# EAGLE board lm3410-boost-flashlight-driver-17mm-mk-1.0.1 (EAGLE 6.6.0)
VERSION: v1.2
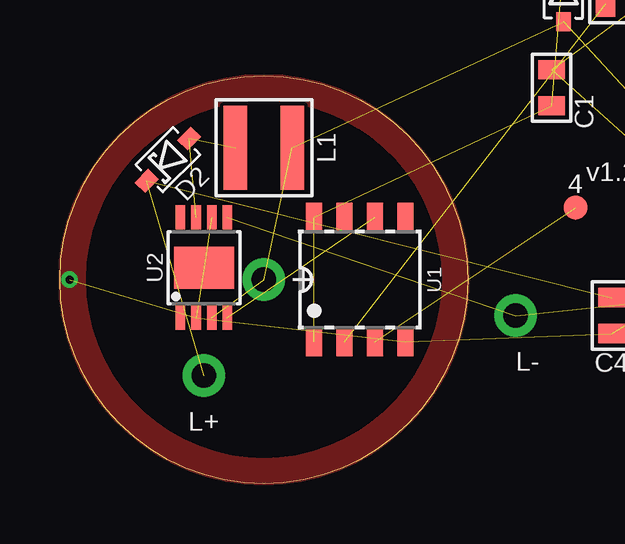
[diagram p0: board, top side]
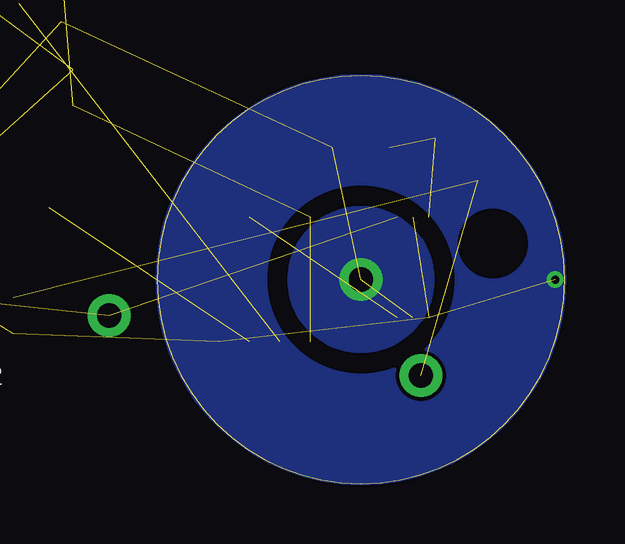
[diagram p1: board, bottom side, seen from below]

Size 17 x 17 mm. Coordinates in mm from the lower left corner, seen from the top.
Outline: 0,8.5 arc-180 17,8.5 arc-180 0,8.5
Copper layers (1*16): Top 0.0356mm / dielectric 1.5011mm / Bottom 0.0356mm
Design rules "LaenPCBOrder2 *": minimum track width 6mil, minimum drill 13mil, track to track 6mil, track to pad 6mil, pad to pad 6mil, via to via 6mil, smd to smd 6mil, copper to edge 0mil, drill to drill 6mil, minimum pad ring 7mil, minimum via ring 7mil, stop-mask expansion 3mil, vias tented up to drill 20mil, thermal gap 10mil
bRestrict: area 1.8,8.8 to 4.2,11.2; area 17.8,5.8 to 20.2,8.2; area 5,5 to 12,12

## Footprints (pad centres in the part's own frame; a part is rotated, then mirrored left to right if it is on the bottom)
1X01-SMD-1MM-DIA-NS = smd 1 x 1: P$1 0,0
1X01-1MM-CIR-NS = drill 1.016 pad 1.778: 1 0,0
1X01_NOSILK_NOSTOP = drill 0.33: P$1 0,0
C0603-TIGHTER = smd 0.8 x 1.1: 1 -0.75,0; 2 0.75,0
SOD323-SCHOTTKY = smd 0.8 x 0.6: A -1.25,0; C 1.25,0
XFL4020 = smd 0.98 x 3.5: P$1 -1.185,0; P$2 1.185,0
R0805 = smd 1.3 x 1.5: 1 -0.95,0; 2 0.95,0
SO08-SKINNYPADS = smd 0.65 x 1.2: 1 -1.905,-2.6; 2 -0.635,-2.6; 3 0.635,-2.6; 4 1.905,-2.6; 5 1.905,2.6; 6 0.635,2.6; 7 -0.635,2.6; 8 -1.905,2.6
MSOP-8-PAD-LM3410 = smd 1 x 0.4: 1 -2.1,0.975; 2 -2.1,0.325; 3 -2.1,-0.325; 4 -2.1,-0.975; 5 2.1,-0.975; 6 2.1,-0.325; 7 2.1,0.325; 8 2.1,0.975 | smd 1.75 x 2.5: PAD 0,0

## Placement (x,y rotation side)
4  M01SMD-1MM-DIA-NS  [1X01-SMD-1MM-DIA-NS]  21.5,11.5 0 top  (outside the outline)
+  M01PTH-1MM-CIR-NS  [1X01-1MM-CIR-NS]  8.5,8.5 180 top
-  M01NOT-A-VIA-NOPE  [1X01_NOSILK_NOSTOP]  0.4,8.5 90 bottom
C1  10u  [C0603-TIGHTER]  20.5,16.5 90 top  (outside the outline)
C2  1u  [C0603-TIGHTER]  23.5,20 0 top  (outside the outline)
C3  4u7  [C0603-TIGHTER]  26,13 180 top  (outside the outline)
C4  10u  [C0603-TIGHTER]  23,7 270 top  (outside the outline)
D1  BAT165  [SOD323-SCHOTTKY]  21,20.5 90 top  (outside the outline)
D2  BAT165  [SOD323-SCHOTTKY]  4.5,13.5 225 top
FRAME1  FRAME-LETTERNO_PACKAGE  [DUMMY]  0,0 0 top
L1  1uH  [XFL4020]  8.5,14 180 top
L+  M01PTH-1MM-CIR-NS  [1X01-1MM-CIR-NS]  6,4.5 270 top
L-  M01PTH-1MM-CIR-NS  [1X01-1MM-CIR-NS]  19,7 180 top
R3  0R127  [R0805]  29,9 270 top  (outside the outline)
U1  Tiny25  [SO08-SKINNYPADS]  12.5,8.5 0 top
U2  LM3410XMYDGN  [MSOP-8-PAD-LM3410]  6,9 90 top

## Library data of the parts
4 + - C1-C4 D1 D2 L1 L+ L- R3 U1 U2 = a_parts
FRAME1 = a_parts; DESIGNER: sean@yak.net; VERSION: v1.2

## Nets
4: 4.P$1 U1.3
ALTPWM: U1.5
FB: L-.1 R3.2 U2.5
GND: -.P$1 C1.2 C2.2 C3.2 C4.2 R3.1 U1.4 U2.2 U2.6 U2.PAD
LED+: C4.1 D2.C L+.1
N$2: C2.1 U1.2
PWM: U1.6 U2.4
SW: D2.A L1.P$2 U2.7
VBAT: +.1 C3.1 D1.A L1.P$1 U2.3
VCC: C1.1 D1.C U1.1 U1.8

## Tracks (layer width: path | path; a pad name or v marks a point on that pad's centre or on a via)
4  (1 unrouted)
FB  (2 unrouted)
GND  (9 unrouted)
  pour Top (isolate 0.152, rank 6, no thermals): 0,8.5 arc90 8.5,0 arc90 17,8.5 16,8.5 arc-90 8.5,1 arc-90 1,8.5
  pour Bottom (isolate 0.152, rank 6, no thermals): 8.5,0 arc-90 0,8.5 arc-90 8.5,17 arc-90 17,8.5 arc-90
  pour Top (isolate 0.152, rank 6, no thermals): 17,8.5 arc90 8.5,17 arc90 0,8.5 1,8.5 arc-90 8.5,16 arc-90 16,8.5
LED+  (2 unrouted)
N$2  (1 unrouted)
PWM  (1 unrouted)
SW  (2 unrouted)
VBAT  (4 unrouted)
  pour Bottom (isolate 0.152, no thermals): 5.5,8.5 arc-180 11.5,8.5 arc-180
VCC  (3 unrouted)

## Text on the board
bPlace: LM3410 Boost / Flashlight Driver